# Altium PCB dc_dc_ver01.PcbDoc
Units mil, origin at the board's own origin, x right, y up, seen from the top; angles counter-clockwise.
Board outline 6299.21 x 3937.01 mil, 2 copper layers (Power layer 1, Signal layer), stack 12.8 mil thick; 59 components, 34 nets, 188 pads, 895 vias.
Unrouted connection lines stored in the file: 19.
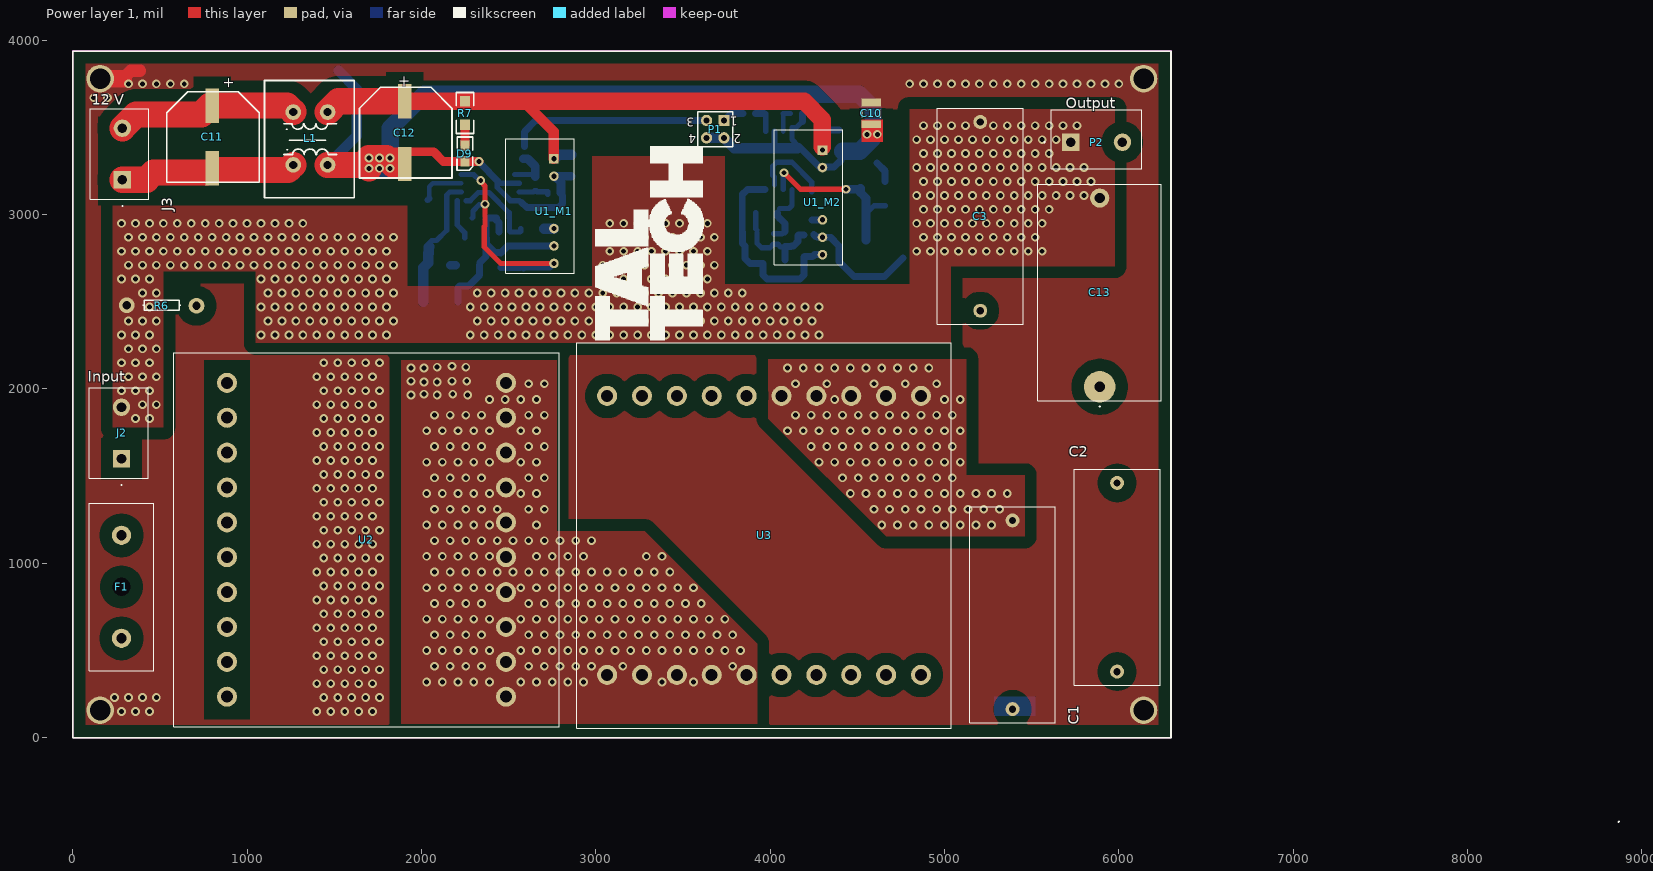
[diagram p0: Power layer 1 view]
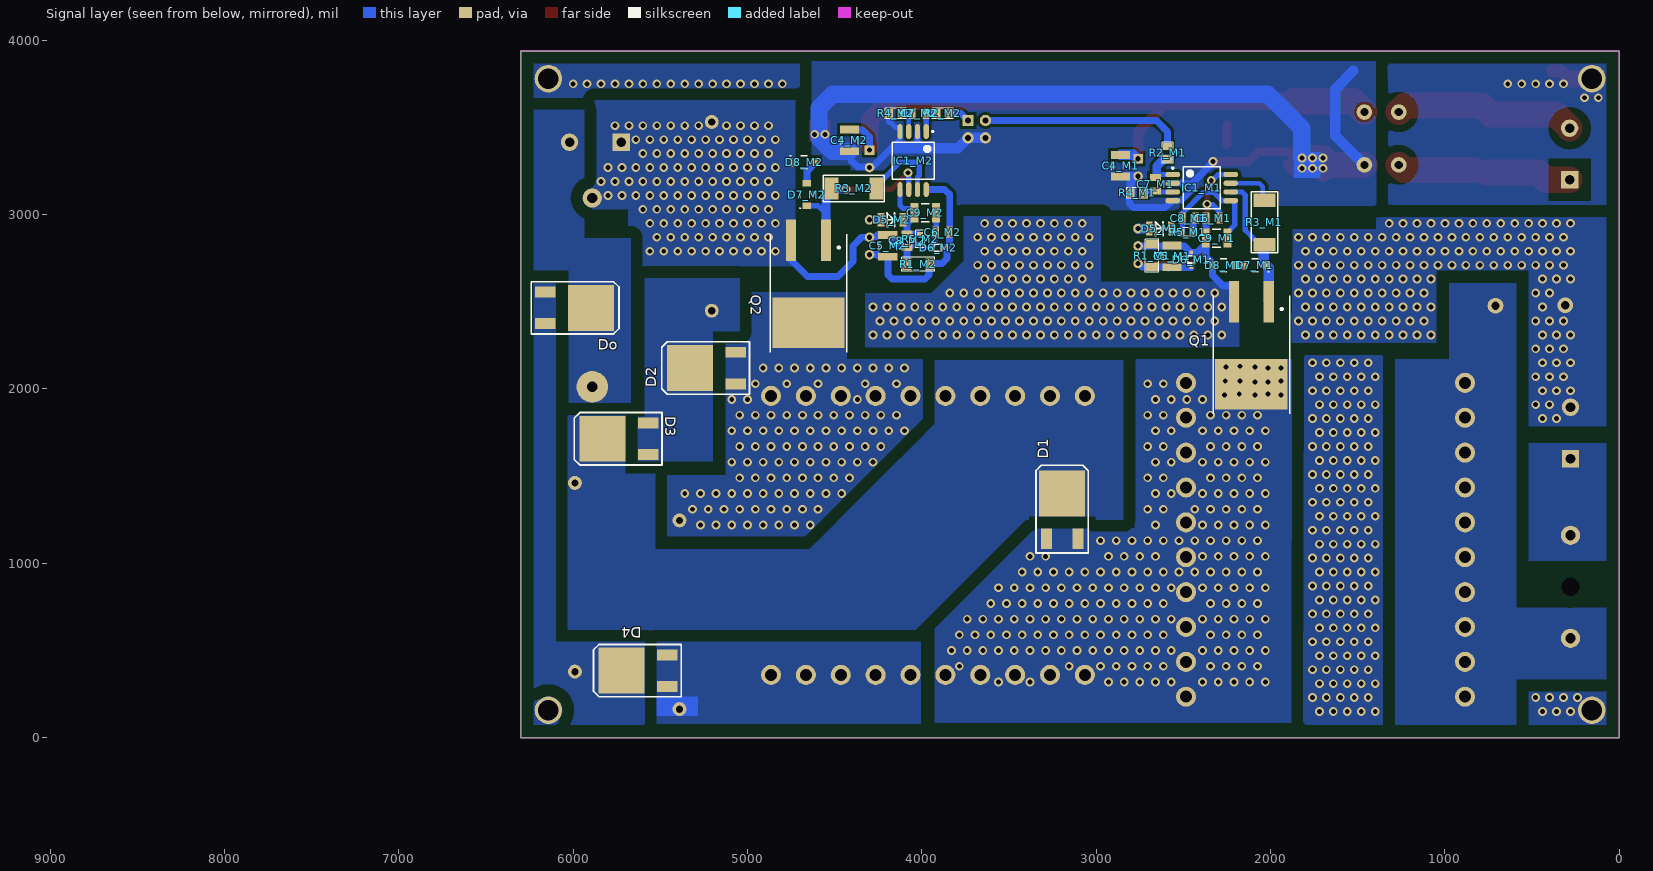
[diagram p1: Signal layer view, seen from below]
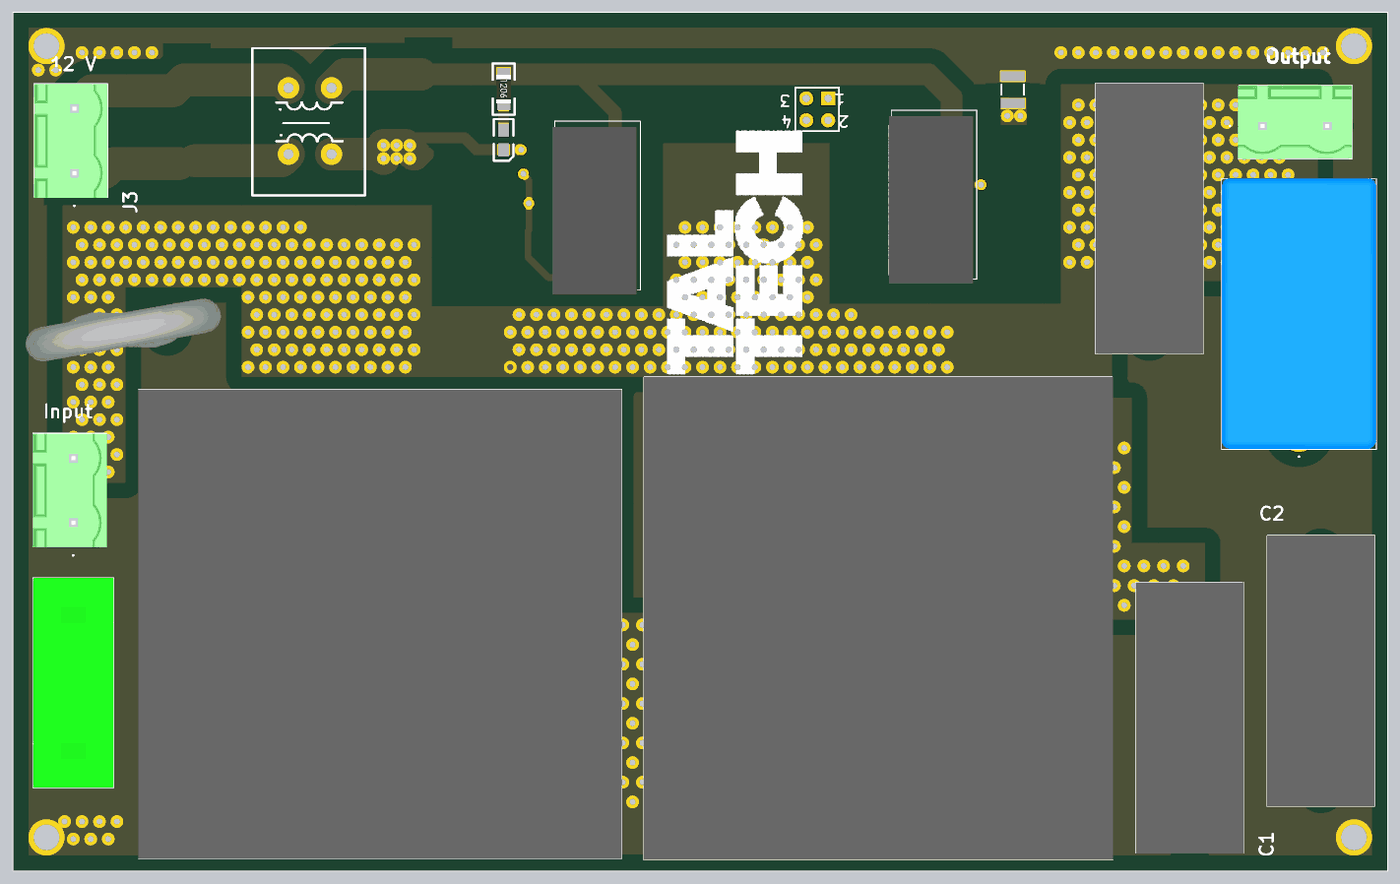
[diagram p2: 3D render of the assembled board from above, using the file's embedded part models]

## Layer stack, top to bottom
Top Solder: solder mask 0.4, Solder Resist, Dk 3.5
Power layer 1: signal copper 1.4
Dielectric 2: dielectric 10, FR-4, Dk 4.2
Signal layer: signal copper 1.4
Bottom Solder: solder mask 0.4, Solder Resist, Dk 3.5

## Board outline
0,0 0,3937.01 6299.21,3937.01 6299.21,0

## Design rules (kind name [scope] priority, off if disabled: settings)
Clearance [OnLayer('Bottom Overlay')] p1: gap=5 ignorepadtopadclearanceinfootprint=FALSE
Clearance Clearance_18 [InNet('G1') vs InNetClass('Driver')] p2: gap=20 ignorepadtopadclearanceinfootprint=FALSE
Clearance Clearance_17 [InNet('MS2') vs InNetClass('Driver')] p3: gap=20 ignorepadtopadclearanceinfootprint=FALSE
Clearance Clearance_16 [InNet('MS2') vs InNet('NetC5_M1_2')] p4: gap=20 ignorepadtopadclearanceinfootprint=FALSE
Clearance Clearance_15 [InNet('G2') vs InNet('NetC8_M2_1')] p5: gap=20 ignorepadtopadclearanceinfootprint=FALSE
Clearance Clearance_14 [InNet('NetIC1_M2_7') vs InNet('G2')] p6: gap=20 ignorepadtopadclearanceinfootprint=FALSE
Clearance Clearance_13 [InNet('MS2') vs InNet('NetC5_M2_2', 'NetD5_M2_1', 'NetC8_M2_1');] p7: gap=20 ignorepadtopadclearanceinfootprint=TRUE
Clearance Clearance_1 [InNet('G1') vs InNet('MS2')] p8: gap=15 ignorepadtopadclearanceinfootprint=FALSE
Clearance Clearance_8 [InNetClass('Power')] p9: gap=70 ignorepadtopadclearanceinfootprint=FALSE
Clearance Clearance_5 [InNetClass('Power') vs InNetClass('Power')] p10: gap=70 ignorepadtopadclearanceinfootprint=FALSE
Clearance Clearance_4 [InNetClass('Power') vs InNetClass('G[2..1]')] p11: gap=70 ignorepadtopadclearanceinfootprint=FALSE
Clearance Clearance_3 [InNetClass('Power') vs InNetClass('+12')] p12: gap=70 ignorepadtopadclearanceinfootprint=FALSE
Clearance Clearance_2 [InNetClass('Power') vs InNetClass('Signal')] p13: gap=70 ignorepadtopadclearanceinfootprint=FALSE
Clearance Clearance_12 [InNet('MS2') vs InNet('NetF1_1')] p14: gap=70 ignorepadtopadclearanceinfootprint=FALSE
Clearance Clearance_11 [InNet('Vin1')] p15: gap=70 ignorepadtopadclearanceinfootprint=FALSE
Clearance Clearance_7 [InNet('PE')] p16: gap=70 ignorepadtopadclearanceinfootprint=FALSE
Clearance Clearance_6 [InNetClass('Signal') vs InNetClass('Signal')] p17: gap=15 ignorepadtopadclearanceinfootprint=FALSE
Clearance Clearance_10 [InNetClass('All Nets')] p18: gap=20 ignorepadtopadclearanceinfootprint=FALSE
Clearance Clearance_19 [All] p19: gap=20 ignorepadtopadclearanceinfootprint=FALSE
ComponentClearance [InComponent('No Component') vs InComponent('No Component')] p1: gap=39.37 collisioncheckmode=3 verticalgap=0 showdistances=FALSE
Height [All] p1: minheight=0 maxheight=10000 prefheight=500
PolygonConnect [All] p1: connectstyle=Direct reliefconductorwidth=10 reliefentries=4 polygonreliefangle="90 Angle" airgapwidth=10
RoutingVias [All] p1: holewidth=28 width=50 viastyle="Through Hole" minholewidth=28 minwidth=50 maxholewidth=28 maxwidth=50
SolderMaskExpansion [All] p1: expansion=4 istentingtop=FALSE
Width [All] p1: maxlimit=200 minlimit=15 preferedwidth=30
28 further rules are at their usual default settings.

## Classes and differential pairs
channel class Driver: M1 M2
net class Signal: +12V GND NetC7_M1_1 NetC7_M1_2 NetC7_M2_1 NetC7_M2_2 Sig1 Sig2
net class Sig[2..1]: Sig1 Sig2
net class Power: G1 G2 MS2 NetC1_1 NetC1_2 NetC2_1 NetC2_2 NetC3_1 NetC13_1 NetD1_1 NetF1_1 Vin1
net class MS[2..1]: MS2
net class G[2..1]: G1 G2
net class Driver: G1 G2 MS2 NetC5_M1_2 NetC5_M2_2 NetC8_M1_1 NetC8_M2_1 NetD5_M1_1 NetD5_M2_1 NetD7_M1_2 NetD7_M2_2 NetIC1_M1_7 NetIC1_M2_7
net class +12: +12V GND NetC11_1 NetC11_2 NetD9_1
component class "Power Board": C1 C2 C3 D1 D2 D3 D4 Do Q1 Q2 U2 U3
component class Main_Clean: C10 C11 C12 C13 D9 F1 J2 J3 L1 P1 P2 R6 R7
component class M2: C4_M2 C5_M2 C6_M2 C7_M2 C8_M2 C9_M2 D5_M2 D6_M2 D7_M2 D8_M2 IC1_M2 R1_M2 R2_M2 R3_M2 R4_M2 R5_M2 U1_M2
component class M1: C4_M1 C5_M1 C6_M1 C7_M1 C8_M1 C9_M1 D5_M1 D6_M1 D7_M1 D8_M1 IC1_M1 R1_M1 R2_M1 R3_M1 R4_M1 R5_M1 U1_M1

## Components (designator, comment, footprint, x,y, rotation, side; value= is the part's Value field where it differs from the comment)
C1 "B32524R3106K" B32524R3106K 5390,705 r270 top
C2 "B32524R3106K" B32524R3106K 5990,920 r270 top
C3 "B32524R3106K" B32524R3106K 5205,2990 r90 top
C4_M1 "Cer_large" CAPC3227X25N 2860,3280 r270 bottom value=22mkF (schematic designator C4)
C4_M2 "Cer_large" CAPC3227X25N 4415,3425 r270 bottom value=22mkF (schematic designator C4)
C5_M1 "Cer_large" CAPC3227X25N 2565,2760 r270 bottom value=22mkF (schematic designator C5)
C5_M2 "Cer_large" CAPC3227X25N 4195,2820 r270 bottom value=22mkF (schematic designator C5)
C6_M1 "C0805C104K5RAC" C_0805 2370,2980 r180 bottom value=0.1uF (schematic designator C6)
C6_M2 "C0805C104K5RAC" C_0805 3920,2900 r180 bottom value=0.1uF (schematic designator C6)
C7_M1 "C0805C100J1GAC" C_0805 2660,3213.74 r270 bottom value=10pF (schematic designator C7)
C7_M2 "C0805C100J1GAC" C_0805 3976.26,3580 r0 bottom value=10pF (schematic designator C7)
C8_M1 "C0805C104K5RAC" C_0805 2508.74,2980 r180 bottom value=0.1uF (schematic designator C8)
C8_M2 "C0805C104K5RAC" C_0805 4085,2890 r270 bottom value=0.1uF (schematic designator C8)
C9_M1 "Cer_large" CAPC3227X25N 2310,2865 r0 bottom value=22mkF (schematic designator C9)
C9_M2 "Cer_large" CAPC3227X25N 3980,3010 r180 bottom value=22mkF (schematic designator C9)
C10 "Cer_large" CAPC3227X25N 4580,3580 r90 top value=22mkF
C11 "NACEW102M25V12.5X14" Cap_pol 1940,4835 r270 top value="1 mF"
C12 "NACEW102M25V12.5X14" Cap_pol 3045,4860 r270 top value="1 mF"
C13 "B32924P3335M000" B32924P_(31.5_x_18) 5890,2012.32 r90 top
D1 "Diode" Dpak 3345.55,1059.81 r180 bottom
D2 "Diode" Dpak 4988,1970 r90 bottom
D3 "Diode" Dpak 5489.81,1564.45 r90 bottom
D4 "Diode" Dpak 5379.81,234.45 r90 bottom
D5_M1 "Zener_1.8V" SOD123 2581.81,3038.11 r180 bottom value=1.8V (schematic designator D5)
D5_M2 "Zener_1.8V" SOD123 4120.83,3088.11 r180 bottom value=1.8V (schematic designator D5)
D6_M1 "DZ2J220M0L" SOD323F 2455,2740 r90 bottom value="22V, 200mW" (schematic designator D6)
D6_M2 "DZ2J220M0L" SOD323F 3906.69,2810 r0 bottom value="22V, 200mW" (schematic designator D6)
D7_M1 "MMSZ4678T1G" CAPM3216X18N 2090,2710 r0 bottom value="6V, 500mW" (schematic designator D7)
D7_M2 "MMSZ4678T1G" CAPM3216X18N 4660,3115 r90 bottom value="6V, 500mW" (schematic designator D7)
D8_M1 "MMSZ4678T1G" CAPM3216X18N 2270,2710 r180 bottom value="6V, 500mW" (schematic designator D8)
D8_M2 "MMSZ4678T1G" CAPM3216X18N 4675,3300 r180 bottom value="6V, 500mW" (schematic designator D8)
D9 "LED1" 0805_LED 2250,3350 r180 top
Do "Diode" Dpak 6240.19,2615.55 r270 bottom
F1 "0PTF0075P" 0PTF0075P 280,1160.55 r270 top
IC1_M1 "ACPL-H342" SOIC127P970X330-8N 2395,3155 r180 bottom value="2,5 A, 12-30V" (schematic designator IC1)
IC1_M2 "ACPL-H342" SOIC127P970X330-8N 4050,3310 r270 bottom value="2,5 A, 12-30V" (schematic designator IC1)
J2 "1766453" 1766453 280,1600 r90 top
J3 "1766453" 1766453 285,3200 r90 top
L1 "Commom_mode_choke" Common_mode 1339.8,3391.3 r0 top value="20 mH 0.5 A"
P1 "Header 2X2" HDR2X2 3735,3540 r180 top
P2 "1766453" 1766453 5725,3415 r0 top
Q1 "IPB048N15N5LFATMA1" D2PAK 2010,2500 r0 bottom
Q2 "IPB048N15N5LFATMA1" D2PAK 4550,2852.44 r0 bottom
R1_M1 "RK73H2BTTD1002F" SMD_1206 2680,2740 r90 bottom value="10k, 0.25 W" (schematic designator R1)
R1_M2 "RK73H2BTTD1002F" SMD_1206 3995,2715 r0 bottom value="10k, 0.25 W" (schematic designator R1)
R2_M1 "RK73H2ATTD1600F" SMD_0805 2590,3355 r270 bottom value="160R, 0.125W" (schematic designator R2)
R2_M2 "RK73H2ATTD1600F" SMD_0805 3880,3580 r0 bottom value="160R, 0.125W" (schematic designator R2)
R3_M1 "RK73B3ATTE120J" SMD_2512 2035,2955 r270 bottom value="12, 1W" (schematic designator R3)
R3_M2 "RK73B3ATTE120J" SMD_2512 4390,3150 r0 bottom value="12, 1W" (schematic designator R3)
R4_M1 "RK73H2ATTD1600F" SMD_0805 2765,3125 r180 bottom value="160R, 0.125W" (schematic designator R4)
R4_M2 "RK73H2ATTD1600F" SMD_0805 4150,3580 r180 bottom value="160R, 0.125W" (schematic designator R4)
R5_M1 "R4K7" smd_0603 2475,2900 r0 bottom value="4.7K, 0.125W" (schematic designator R5)
R5_M2 "R4K7" smd_0603 4010,2860 r90 bottom value="4.7K, 0.125W" (schematic designator R5)
R6 "420 VAC , 560 VDC" AXIAL-0.3 510,2480 r0 top
R7 "R300" "1206_SMD 2" 2200,3700.98 r270 top value="300, 0.125W"
U1_M1 "MGJ2D242005SC" MURATA-MGJ2 2760,3320 r270 top (schematic designator U1)
U1_M2 "MGJ2D242005SC" MURATA-MGJ2 4300,3370 r270 top (schematic designator U1)
U2 "B66368B1020T1" B66368B1020T1 885,2035 r270 top
U3 "B66368B1020T1" B66368B1020T1 3065,360 r0 top

## Footprints (in the part's own frame and the unit in brackets; to place one, negate y for a bottom-side part, rotate by r counter-clockwise, add the part's x,y. Pads: shape width x height; smd on the part's side, far side on the other; paste and mask are expansions set on the pad)
0PTF0075P [mm]
  round 2.794 hole 1.5: 1(0,0) 2(15,0)
  round 1.325 hole 2.65 unplated: MH1(7.5,0)
  silkscreen extent -4.7,-4.7 19.7,4.7, body extent -4.7,-4.7 19.7,4.7, height 11.42
0805_LED [mil]
  rect 50x60 smd: A(0.2,-44.8) K(0.2,45.2)
  silkscreen extent -45,-95 45,95
"1206_SMD 2" [mil]
  rect 60x60 smd: 1(50.98,50) 2(185.98,50)
  silkscreen extent 1,0 236,100, body extent 53,16 184,84, height 33
1766453 [mm]
  rect 2.54x2.54 hole 1.4: 1(0,0)
  round 2.54 hole 1.4: 2(7.5,0)
  silkscreen extent -3.9,-3.87 10.35,4.7, body extent -2.9,-3.89 10.3,4.71, height 12.6
AXIAL-0.3 [mil]
  round 90 hole 47.24: 1(-200,0) 2(200,-2.95)
  silkscreen extent -109,-30 109,30, body extent -465,-181 463,181, height 1634
B32524R3106K [mil]
  round 80 hole 41.34: 1(-541.34,0) 2(541.34,0)
  silkscreen extent -620,-246 620,246, body extent -620,-246 620,246, height 850
B32924P_(31.5_x_18) [mil]
  round 180 hole 59.06: 1(0,0)
  round 110 hole 59.06: 2(1082.68,0)
  silkscreen extent -114,-354 1161,354, body extent -76,-354 1164,354, height 1293
B66368B1020T1 [mil]
  round 115 hole 68.9: 1(0,0) 2(200,0) 3(400,0) 4(600,0) 5(800,0) 6(1000,0) 7(1200,0) 8(1400,0) 9(1600,0) 10(1800,0) 11(1800,1600) 12(1600,1600) 13(1400,1600) 14(1200,1600) 15(1000,1600) 16(800,1600) 17(600,1600) 18(400,1600) 19(200,1600) 20(0,1600)
  silkscreen extent -173,-306 1973,1906, body extent -173,-306 1973,1906, height 1614
C_0805 [mm]
  rect 1x1.6 smd: 1(0,0) 2(2,0)
  body extent 0.02,-0.62 2.02,0.63, height 0.78
Cap_pol [mil]
  rect 196.85x78.74 smd mask+4: 1(1210,-1140)
  rect 196.85x78.74 smd: 2(1570,-1140)
  silkscreen extent 1130,-1400 1650,-870
CAPC3227X25N [mm] "Chip Capacitor, 2-Leads, Body 3.2x2.7mm, IPC Medium Density"
  rect 1.15x2.8 smd: 1(-1.575,0) 2(1.575,0)
  silkscreen extent -0.6,-1.3 0.6,1.3, body extent -1.75,-1.35 1.75,1.35, height 2.5
CAPM3216X18N [mm]
  rect 0.91x1.22 smd: 1(-1.635,0) 2(1.635,0)
  silkscreen extent -2.04,-0.95 0.48,1, body extent -1.42,-0.9 1.42,0.9, height 1.35
Common_mode [mm]
  round 2.286 hole 1.2: 1(-1.9,5) 2(-1.9,-2.7) 3(3.1,-2.7) 4(3.1,5)
  silkscreen extent -6.1,-7.5 7,9.6
D2PAK [mm]
  rect 1.5x6 smd: 1(0,0) 3(5.08,0)
  rect 10.55x7.4 smd: 2(2.54,12)
  silkscreen extent -3.04,-0.9 8.12,16.3, body extent -2.54,-0.84 7.62,14.42, height 4.88
Dpak [mm]
  rect 1.6x3 smd: 1(1.51,2.037) 3(6.11,2.037)
  rect 6.7x6.7 smd: 2(3.81,8.687)
  silkscreen extent 0,0 7.62,12.78, body extent 0.49,1.71 7.03,11.65, height 2.41
HDR2X2 [mil] "Connector; Header; 2x2 Position"
  rect 65x65 hole 35.43: 1(0,0)
  round 65 hole 35.43: 2(0,100) 3(100,0) 4(100,100)
  silkscreen extent -50,-50 150,150
MURATA-MGJ2 [mil]
  rect 55x55 hole 29.53: 1(0,0)
  round 55 hole 29.53: 2(100,0) 5(400,0) 6(500,0) 7(600,0)
  silkscreen extent -116,-276 657,115, body extent -90,-288 678,98, height 506
smd_0603 [mm]
  rect 0.6x0.9 smd: 1(-0.75,0) 2(0.75,0)
  silkscreen extent -1.27,-0.64 1.27,0.64
SMD_0805 [mm]
  rect 1.05x1.3 smd: 1(-0.889,0) 2(0.889,0)
  silkscreen extent -1.52,-0.76 1.52,0.76
SMD_1206 [mm]
  rect 1.25x1.7 smd: 1(-1.016,0) 2(2.286,0)
  silkscreen extent -1.78,-1.02 3.05,1.02
SMD_2512 [mm]
  rect 2x3.2 smd: 1(-3.25,0) 2(3.25,0)
  silkscreen extent -4.44,-1.91 4.44,1.91
SOD123 [mm]
  rect 1x2 smd: 1(-2.9,-3) 2(0.3,-3)
  silkscreen extent -2.3,-4 -0.3,-2
SOD323F [mm]
  rect 0.5x0.5 smd: 1(1.1,0) 2(-1.1,0)
  silkscreen extent -0.5,-0.5 0.6,0.5, body extent -0.9,-0.67 0.9,0.67, height 0.8
SOIC127P970X330-8N [mm] "SOIC, 8-Leads, Body 6.1x6.8mm (max), Pitch 1.27mm, IPC Medium Density"
  oval 2.16x0.76 smd: 1(-4.225,1.905) 2(-4.225,0.635) 3(-4.225,-0.635) 4(-4.225,-1.905) 5(4.225,-1.905) 6(4.225,-0.635) 7(4.225,0.635) 8(4.225,1.905)
  silkscreen extent -4.35,-3.05 2.7,3.05, body extent -3.4,-3.05 3.4,3.05, height 3.3

## Part data
C1 C2 C3: "Capacitor", Manufacturer_Name=TDK, Mouser Part Number=871-B32524R3106K, Arrow Part Number=B32524R3106K, Arrow Price/Stock=https://www.arrow.com/en/products/b32524r3106k/epcos-tdk?region=nac, Datasheet Link=https://componentsearchengine.com/Datasheets/1/B32524R3106K.pdf, Height=21.5mm, Manufacturer_Part_Number=B32524R3106K, Mouser Price/Stock=https://www.mouser.co.uk/ProductDetail/EPCOS-TDK/B32524R3106K?qs=xEJ61ozf1a2Uwb6OZwaixw%3D%3D
C4_M1 C4_M2 C5_M1 C5_M2 C9_M1 C9_M2 C10: Package=1210, Order code=1759466, Price=0.407, Supplier=Farnel, Type=16V
C6_M1 C6_M2 C8_M1 C8_M2: "0.1u, 50V", Manufacturer=Kemet, Package="smd 0805", Order code=6576631, Price=0,06, Supplier=Elfa, Type=C0805C104K5RAC
C7_M1 C7_M2: "10p, 100V", Manufacturer=Kemet, Package="smd 0805", Order code=6576805, Price=0,266, Supplier=Elfa, Type=C0805C100J1GAC
C13: "Capacitor", Manufacturer_Name=TDK, Mouser Part Number=871-B32924P3335M000, Datasheet Link=https://product.tdk.com/system/files/dam/doc/product/capacitor/film/emi/data_sheet/x2_b32922_924_p_q.pdf, Height=33mm, Manufacturer_Part_Number=B32924P3335M000, Mouser Price/Stock=https://www.mouser.co.uk/ProductDetail/EPCOS-TDK/B32924P3335M000?qs=KUoIvG%2F9IlY7%252B78GbxRzbA%3D%3D
D1 D2 D3 D4 Do: "Default Diode", Code_JEDEC=DO-214-AB, LatestRevisionDate=17-Jul-2002, LatestRevisionNote="Re-released for DXP Platform.", PackageDescription="DO-214-AB/SMC; 2 C-Bend Leads; Body 7.9 x 5.9 mm, inc. leads (LxW)", PackageReference=SMC, PackageVersion=Sep-1996, Published=8-Jun-2000, Publisher="Altium Limited"
D5_M1 D5_M2: "Zener diode", Package=SOD-123, Order code=1459115, Price=0.172, Supplier=Farnell, Type=0.5W
D6_M1 D6_M2: Package=SOD323F, Order code=2285315, Price=0.041, Supplier=Farnel, Type="Zener diode"
D7_M1 D7_M2 D8_M1 D8_M2: library part Zener_MMSZ5233BT1G, "6V, 500mW, Zener Diodes", Manufacturer="ON Semiconductor", Package=SOD-123-2, PartNumber=MMSZ5233BT1G, Order code=863-MMSZ5233BT1G, Price=0,18, Supplier=Mouser, Type="Zener Diodes"
D9: "Typical RED GaAs LED", LatestRevisionDate=08-Jul-2005, LatestRevisionNote="Mech Layer 1 removed.", PackageDescription="LED; 2 Leads", PackageReference=LED-1, Published=8-Jun-2000, Publisher="Altium Limited"
F1: "Fuse", Manufacturer_Name=LITTELFUSE, Mouser Part Number=576-0PTF0075P, Arrow Part Number=0PTF0075P, Arrow Price/Stock=https://www.arrow.com/en/products/0ptf0075p/littelfuse?region=europe, Datasheet Link=https://media.digikey.com/pdf/Data%20Sheets/Littelfuse%20PDFs/0PTF0075P_Dwg.pdf, Height=11.5mm, Manufacturer_Part_Number=0PTF0075P, Mouser Price/Stock=https://www.mouser.co.uk/ProductDetail/Littelfuse/0PTF0075P?qs=gu7KAQ731UQYbEqVl9aylw%3D%3D
IC1_M1 IC1_M2: Manufacturer=Avago, Package=SSO-8, Order code=1833408, Price=2, Supplier=Farnell, Type=ACPL-H342
J2 J3 P2: "Connector", Manufacturer_Name="Phoenix Contact", Mouser Part Number=651-1766453, Datasheet Link=http://www.phoenixcontact.com/de/produkte/1766453/pdf, Height=12mm, Manufacturer_Part_Number=1766453, Mouser Price/Stock=https://www.mouser.co.uk/ProductDetail/Phoenix-Contact/1766453?qs=s6DiDDoRpTbteEwY3ZEIDg%3D%3D
L1: Manufacturer="Wьrth Elektronik", Package=Trough_hole, Order code=15857854, Price=4,54, Supplier=Elfa, Type="Common mode choke"
P1: "Header, 2-Pin, Dual row", LatestRevisionDate=17-Jul-2002, LatestRevisionNote="Re-released for DXP Platform.", Publisher="Altium Limited"
Q1 Q2: "Trans MOSFET N-CH 150V 120A 3-Pin(2+Tab) D2PAK T/R", Manufacturer_Name=Infineon, Mouser Part Number=726-IPB048N15N5LF, Datasheet Link=https://componentsearchengine.com/Datasheets/1/IPB048N15N5LFATMA1.pdf, Geometry.Height=4.82mm, Manufacturer_Part_Number=IPB048N15N5LFATMA1, Mouser Price/Stock=https://www.mouser.co.uk/ProductDetail/Infineon-Technologies/IPB048N15N5LFATMA1?qs=HXFqYaX1Q2ypITzfwKA8Fg%3D%3D
R1_M1 R1_M2: "10k, 0.25 W", Manufacturer=KOA, Package="smd 1206", datasheet=https://www1.elfa.se/data1/wwwroot/assets/datasheets/06016752.pdf, Order code=6019731, Price=0,111, Supplier=Elfa, Type=RK73H2BTTD1002F
R2_M1 R2_M2 R4_M1 R4_M2: "160R, 0.125W", Manufacturer=KOA, Package="smd 0805", Order code=60-173-05, Price=0.097, Supplier=Elfa, Type="1%, 150V"
R3_M1 R3_M2: Manufacturer=KOA, Package="smd 2512", Order code=60-205-98, Price=0,144, Supplier=Elfa, Type="200V, 5%"
R5_M1 R5_M2: Package="smd 0603", Order code=9332154, Price=0.01, Supplier=Farnel, Type="16V, 1%"
R6: library part Var_V420LA10P, "420 VAC , 560 VDC, Varistor", Manufacturer=EPCOS, Package="48X8X6 mm", PartNumber=B72207S0461K101, Supplier Part Number 1=871-B72207S461K101, Order code=871-B72207S461K101, Price=0,432, Supplier=Mouser, Supplier 1=Mouser, Type=Varistors
R7: Package="smd 2010", Type="16V, 1%"
U1_M1 U1_M2: "Undefined or Miscellaneous", Manufacturer_Name="Murata Electronics", Mouser Part Number=580-MGJ2D242005SC, Arrow Part Number=MGJ2D242005SC, Arrow Price/Stock=https://www.arrow.com/en/products/mgj2d242005sc/murata-power-solutions?region=nac, Datasheet Link=http://power.murata.com/data/power/ncl/kdc_mgj2.pdf, Manufacturer_Part_Number=MGJ2D242005SC, Mouser Price/Stock=https://www.mouser.co.uk/ProductDetail/Murata-Power-Solutions/MGJ2D242005SC?qs=xLDY6iXSiQZFsrjCzeaXXw%3D%3D
U2 U3: "Undefined or Miscellaneous", Manufacturer_Name=TDK, Mouser Part Number=871-B66368B1020T1, Arrow Part Number=B66368B1020T1, Arrow Price/Stock=https://www.arrow.com/en/products/b66368b1020t1/epcos-tdk?region=nac, Datasheet Link=https://www.mouser.com/datasheet/2/400/etd_49_25_16-1220447.pdf, Height=40.9mm, Manufacturer_Part_Number=B66368B1020T1, Mouser Price/Stock=https://www.mouser.co.uk/ProductDetail/EPCOS-TDK/B66368B1020T1?qs=fWY6Jreybtns4G%252BQgkB59A%3D%3D
C11 C12: Order code=16731346, Price=3,28, Supplier=Elfa, Type=25V

## Free pads (board coordinates)
  round 157.48 hole 118.11: 0(157.48,157.48) 0(157.48,3779.53) 0(6141.73,157.48) q(6141.73,3779.53)

## Via types
v1: diameter 50, hole 28, Power layer 1 to Signal layer, 895 vias

## Nets (pads, with @x,y where several pads share a name; then routed paths per layer and width w, separated by ;. In a path a pad name is that pad's centre, name@x,y a point inside that pad or via, vN(x,y) a via of type N, cw(c..) or ccw(c..) an arc to the next point about the centre after c; other vN are vias at no path point)
+12V: C4_M1.1 C4_M2.1 C12.1 L1.4 R7.1 U1_M1.1 U1_M2.1 | length 3719.8
  Power layer 1 w60: 2585,3650 2760,3475 U1_M1.1
  Power layer 1 w100: C12.1 R7.1 2585,3650 4195,3650 4300,3545 U1_M2.1@4300,3390
  Power layer 1 w150: L1.4 1523.7,3650 C12.1@1869.37,3650
  Signal layer w40: U1_M2.1 4300,3445 4339.37,3484.37 4394.37,3484.37 C4_M2.1@4395,3485
  Signal layer w60: U1_M1.1@2765,3320 2787.01,3342.01 C4_M1.1
G1: D7_M1.1 IC1_M1.6 Q1.1 R3_M1.2 | length 767.4
  Signal layer w30: R3_M1.2 2059.37,2851.42 2086.42,2851.42 2145,2910 2145,3112.39 2162.57,3129.96 2228.62,3129.96 IC1_M1.6
  Signal layer w60: Q1.1 2010,2694.37 D7_M1.1 2040,2724.37 2040,2777.53 2042.01,2779.54 2042.01,2812.68 R3_M1.2@2044.67,2815.33
G2: D7_M2.1 IC1_M2.6 Q2.1 R3_M2.2 | length 1083.5
  Power layer 1 w30: v1(4080,3240) 4175,3145 v1(4435,3145)
  Signal layer w30: IC1_M2.6 4075,3171.14 4075.04,3171.18 4075.04,3229.63 4080,3234.59 v1(4080,3240) ; Q2.1@4550,2950 4550,3005 4595.63,3050.63 D7_M2.1
  Signal layer w50: v1(4435,3145) 4503.58,3145 R3_M2.2@4522.95,3125.63 ; R3_M2.2 4517.95,3126.38 4550,3094.33 4550,3005 4550,2950 Q2.1
GND: C4_M1.2 C4_M2.2 C10.1 C12.2 D9.K IC1_M1.2 IC1_M1.4 IC1_M2.2 IC1_M2.4 L1.3 P1.2 P1.4 R4_M1.1 R4_M2.1 U1_M1.2 U1_M2.2 | length 7458.1
  Power layer 1 w50: v1(1700,3265) v1(1760,3265) ; 1795,3360 2070,3360 2125,3305 D9.K@2240,3305 ; v1(1820,3265) 1890.63,3265 1905,3279.37 C12.2 ; D9.K@2255,3310 2260,3305 v1(2330,3305)
  Power layer 1 w150: L1.3 1680,3285 v1(1700,3265) v1(1700,3325) 1800,3325 1840,3285
  Signal layer w30: 2440,3195 2437.5,3192.5 2435,3190 2435,3180 2435,3155 2509.96,3080.04 IC1_M1.4 IC1_M1.4 ; 2450,3180 IC1_M1.2 ; 4161.34,3393.66 4125,3430 IC1_M2.4 4125,3499.96 4125.04,3500 4150,3500 4184.33,3534.33
  Signal layer w35: 4025,3380 IC1_M2.2
  Signal layer w40: v1(2330,3305) 2330,3302.29 2388.48,3243.81 2388.48,3241.52 2437.5,3192.5 ; IC1_M1.4@2574.96,3070.04 2605,3040 2787.02,3040 2810.46,3063.43 2810.46,3109.62 2800.67,3119.41 2800.67,3124.33 R4_M1.1 ; 4165,3390 4283.24,3271.76 4298.24,3271.76 U1_M2.2 ; 4184.33,3534.33 4184.33,3579.33 R4_M2.1 ; U1_M2.2@4301.76,3271.76 4366.76,3271.76 4405,3310
  Signal layer w50: U1_M1.2 U1_M1.2@2765,3220 ; R4_M1.1 2800,3185 U1_M1.2@2765,3220 ; C4_M1.2@2857.99,3220 U1_M1.2@2765,3220
  Signal layer w60: L1.3 1630,3453.15 1630,3720 1525,3825 ; P1.4 P1.2 3795,3380 4025,3380 4155,3380
  Signal layer w100: 1790,3305 v1@1810,3305 ; v1(1820,3325) 1820,3495 2015,3690 4510,3690 4590,3610 4590,3440 4512.99,3362.99 C4_M2.2
  other v1: 1760,3325 4555,3460 4615,3460
MS2: C3.2 C5_M1.1 C5_M2.1 C6_M1.1 C6_M2.1 C8_M1.2 C8_M2.2 C9_M1.2 C9_M2.2 C13.2 D6_M1.1 D6_M2.1 D8_M1.1 D8_M2.1 J2.2 P2.1 Q1.3 Q2.3 R1_M1.2 R1_M2.2 R5_M1.1 R5_M2.1 R6.1 U1_M1.6 U1_M2.6 | length 2387.6
  Signal layer w30: C9_M2.2 3917.99,2917.01 C6_M2.1@3925,2910 ; C6_M2.1@3924.69,2895 3924.69,2835.31 D6_M2.1 3999.53,2810 4020,2830.47 4044.53,2830.47 C8_M2.2@4060,2815
  Signal layer w40: Q1.3 2210,2581.72 2219.53,2591.25 2271.25,2591.25 2334.37,2654.37 D8_M1.1 ; D8_M1.1@2335,2725 2369.37,2759.37 2369.37,2831.89 2372.01,2834.53 C9_M1.2 ; C9_M1.2@2370,2834.53 2421.22,2783.31 D6_M1.1 ; C9_M1.2@2370,2865 C6_M1.1@2370,2960 ; C6_M1.1 C8_M1.2@2425,2980 ; C8_M1.2@2426.26,2968.82 2426.26,2980 C8_M1.2@2426.57,2979.69 ; C8_M1.2 2430,2968.82 2430.31,2968.5 2431.11,2968.5 2445.47,2954.14 R5_M1.1 ; D6_M1.1@2455,2780 2495,2820 U1_M1.6 ; R1_M2.2@4085,2740 4085,2816.26 4118.94,2816.26 4123.31,2820.63 4133.62,2820.63 4159.88,2846.89 4159.88,2879.37 4162.52,2882.01 C5_M2.1 ; C5_M2.1@4250,2885 4260,2875 4265,2875 4268.24,2871.76 4298.24,2871.76 U1_M2.6 4345,2870 4395,2820 4395,2730 4480,2645 4655,2645 Q2.3@4761.93,2751.93
  other v1: 360,1830 440,1830 400,1910 480,1910 280,1990 360,1990 440,1990 320,2070 400,2070 480,2070 280,2150 360,2150 440,2150 320,2230 400,2230 480,2230 280,2310 360,2310 440,2310 1080,2310 1160,2310 1240,2310 1320,2310 1400,2310 1480,2310 1560,2310 1640,2310 1720,2310 1800,2310 2280,2310 2360,2310 2440,2310 2520,2310 2600,2310 2680,2310 2760,2310 2840,2310 2920,2310 3000,2310 3080,2310 3160,2310 3240,2310 3320,2310 3400,2310 3480,2310 3560,2310 3640,2310 3720,2310 3800,2310 3880,2310 3960,2310 4040,2310 4120,2310 4200,2310 4280,2310 320,2390 400,2390 480,2390 1120,2390 1200,2390 1280,2390 1360,2390 1440,2390 1520,2390 1600,2390 1680,2390 1760,2390 1840,2390 2320,2390 2400,2390 2480,2390 2560,2390 2640,2390 2720,2390 2800,2390 2880,2390 2960,2390 3040,2390 3120,2390 3200,2390 3280,2390 3360,2390 3440,2390 3520,2390 3600,2390 3680,2390 3760,2390 3840,2390 3920,2390 4000,2390 4080,2390 4160,2390 4240,2390 440,2470 1080,2470 1160,2470 1240,2470 1320,2470 1400,2470 1480,2470 1560,2470 1640,2470 1720,2470 1800,2470 2280,2470 2360,2470 2440,2470 2520,2470 2600,2470 2680,2470 2760,2470 2840,2470 2920,2470 3000,2470 3080,2470 3160,2470 3240,2470 3320,2470 3400,2470 3480,2470 3560,2470 3640,2470 3720,2470 3800,2470 3880,2470 3960,2470 4040,2470 4120,2470 4200,2470 4280,2470 400,2550 480,2550 1120,2550 1200,2550 1280,2550 1360,2550 1440,2550 1520,2550 1600,2550 1680,2550 1760,2550 1840,2550 2320,2550 2400,2550 2480,2550 2560,2550 2640,2550 2720,2550 2800,2550 2880,2550 2960,2550 3040,2550 3120,2550 3200,2550 3280,2550 3360,2550 3440,2550 3520,2550 3600,2550 3680,2550 3760,2550 3840,2550 280,2630 360,2630 440,2630 1080,2630 1160,2630 1240,2630 1320,2630 1400,2630 1480,2630 1560,2630 1640,2630 1720,2630 1800,2630 3080,2630 3160,2630 3240,2630 3320,2630 3400,2630 3480,2630 3560,2630 3640,2630 320,2710 400,2710 480,2710 560,2710 640,2710 720,2710 800,2710 880,2710 960,2710 1040,2710 1120,2710 1200,2710 1280,2710 1360,2710 1440,2710 1520,2710 1600,2710 1680,2710 1760,2710 1840,2710 3040,2710 3120,2710 3200,2710 3280,2710 3360,2710 3440,2710 3520,2710 3600,2710 3680,2710 280,2790 360,2790 440,2790 520,2790 600,2790 680,2790 760,2790 840,2790 920,2790 1000,2790 1080,2790 1160,2790 1240,2790 1320,2790 1400,2790 1480,2790 1560,2790 1640,2790 1720,2790 1800,2790 3080,2790 3160,2790 3240,2790 3320,2790 3400,2790 3480,2790 3560,2790 3640,2790 4840,2790 4920,2790 5000,2790 5080,2790 5160,2790 5240,2790 5320,2790 5400,2790 5480,2790 5560,2790 320,2870 400,2870 480,2870 560,2870 640,2870 720,2870 800,2870 880,2870 960,2870 1040,2870 1120,2870 1200,2870 1280,2870 1360,2870 1440,2870 1520,2870 1600,2870 1680,2870 1760,2870 1840,2870 3040,2870 3120,2870 3200,2870 3280,2870 3360,2870 3440,2870 3520,2870 3600,2870 3680,2870 4880,2870 4960,2870 5040,2870 5120,2870 5200,2870 5280,2870 5360,2870 5440,2870 5520,2870 280,2950 360,2950 440,2950 520,2950 600,2950 680,2950 760,2950 840,2950 920,2950 1000,2950 1080,2950 1160,2950 1240,2950 1320,2950 3080,2950 3160,2950 3240,2950 3320,2950 3400,2950 3480,2950 3560,2950 3640,2950 4840,2950 4920,2950 5000,2950 5080,2950 5160,2950 5240,2950 5320,2950 5400,2950 5480,2950 5560,2950 4880,3030 4960,3030 5040,3030 5120,3030 5200,3030 5280,3030 5360,3030 5440,3030 5520,3030 5600,3030 4840,3110 4920,3110 5000,3110 5080,3110 5160,3110 5240,3110 5320,3110 5400,3110 5480,3110 5560,3110 5640,3110 5720,3110 5800,3110 4880,3190 4960,3190 5040,3190 5120,3190 5200,3190 5280,3190 5360,3190 5440,3190 5520,3190 5600,3190 5680,3190 5760,3190 5840,3190 4840,3270 4920,3270 5000,3270 5080,3270 5160,3270 5240,3270 5320,3270 5400,3270 5480,3270 5560,3270 5640,3270 5720,3270 5800,3270 4880,3350 4960,3350 5040,3350 5120,3350 5200,3350 5280,3350 5360,3350 5440,3350 5520,3350 5600,3350 4840,3430 4920,3430 5000,3430 5080,3430 5160,3430 5240,3430 5320,3430 5400,3430 5480,3430 5560,3430 5640,3430 4880,3510 4960,3510 5040,3510 5120,3510 5280,3510 5360,3510 5440,3510 5520,3510 5600,3510 5680,3510 5760,3510
NetC1_1: C1.1 D2.1 D2.3 Q2.2 U3.11 U3.12 U3.13 U3.14 U3.15
  other v1: 4640,1220 4730,1220 4820,1220 4910,1220 5000,1220 5090,1220 5180,1220 5270,1220 4595,1310 4685,1310 4775,1310 4865,1310 4955,1310 5045,1310 5135,1310 5225,1310 5315,1310 4460,1400 4550,1400 4640,1400 4730,1400 4820,1400 4910,1400 5000,1400 5090,1400 5180,1400 5270,1400 5360,1400 4415,1490 4505,1490 4595,1490 4685,1490 4775,1490 4865,1490 4955,1490 5045,1490 4280,1580 4370,1580 4460,1580 4550,1580 4640,1580 4730,1580 4820,1580 4910,1580 5000,1580 5090,1580 4235,1670 4325,1670 4415,1670 4505,1670 4595,1670 4685,1670 4775,1670 4865,1670 4955,1670 5045,1670 4100,1760 4190,1760 4280,1760 4370,1760 4460,1760 4550,1760 4640,1760 4730,1760 4820,1760 4910,1760 5000,1760 5090,1760 4145,1850 4235,1850 4325,1850 4415,1850 4505,1850 4595,1850 4685,1850 4775,1850 4865,1850 4955,1850 5045,1850 4370,1940 5000,1940 5090,1940 4145,2030 4325,2030 4595,2030 4775,2030 4955,2030 4100,2120 4190,2120 4280,2120 4370,2120 4460,2120 4550,2120 4640,2120 4730,2120 4820,2120 4910,2120
NetC1_2: C1.2 D4.1 D4.3 U3.6 U3.7 U3.8 U3.9 U3.10
NetC2_1: C2.1 D1.2 D3.2 U3.16 U3.17 U3.18 U3.19 U3.20
NetC2_2: C2.2 D4.2 Do.1 Do.3
NetC3_1: C3.1 D2.2 D3.1 D3.3
NetC5_M1_2: C5_M1.2 C6_M1.2 D6_M1.2 IC1_M1.8 R1_M1.1 U1_M1.7 | length 1378.3
  Power layer 1 w30: v1(2340,3195) 2340,3189.59 2365,3164.59 2365,2936.54 2360.75,2932.29 2360.75,2814.25 2455,2720 U1_M1.7@2757.82,2720
  Signal layer w30: IC1_M1.8 IC1_M1.8 2299.63,3229.96 2334.59,3195 v1(2340,3195) ; C6_M1.2 2295.94,2984.69 2295.94,3020.94 2331.17,3056.17 2361.17,3056.17 v1(2365,3060)
  Signal layer w40: D6_M1.2 C5_M1.2@2565,2696.69 ; C5_M1.2@2585,2695 2590,2700 R1_M1.1 2737.51,2700 2757.51,2720 U1_M1.7
NetC5_M2_2: C5_M2.2 C6_M2.2 D6_M2.2 IC1_M2.8 R1_M2.1 U1_M2.7 | length 1167.1
  Signal layer w40: C6_M2.2@3840,2900 3840,3115 3870,3145 IC1_M2.8@3970,3145 ; C6_M2.2@3841.26,2888.82 C6_M2.2 3841.26,2833.74 3855,2820 3855,2748.62 3884.37,2719.25 3959.61,2719.25 3959.61,2653.43 3983.04,2630 4171.57,2630 4195,2653.43 C5_M2.2@4195,2750 ; C5_M2.2 4197.64,2760.63 4244.18,2760.63 4253.55,2770 U1_M2.7@4297.51,2770
NetC7_M1_1: C7_M1.1 IC1_M1.1 R2_M1.2 | length 258.1
  Signal layer w30: IC1_M1.1@2535,3230 IC1_M1.1 2635,3230 C7_M1.1@2645,3220
  Signal layer w50: R2_M1.2@2585,3320 R2_M1.2 2610,3320 2653.5,3276.5 C7_M1.1@2653.5,3219.06
NetC7_M1_2: C7_M1.2 IC1_M1.3 R4_M1.2 | length 184.4
  Signal layer w30: IC1_M1.3 2641.93,3130 2648.19,3136.26 2660,3136.26 2664.69,3131.57 2724.33,3131.57 2725,3130.91 R4_M1.2@2725,3115
NetC7_M2_1: C7_M2.1 IC1_M2.1 R2_M2.2 | length 153.6
  Signal layer w30: C7_M2.1@3965,3580 C7_M2.1@3975,3580 ; IC1_M2.1 3975.04,3476.38 C7_M2.1@3975.04,3569.96
  Signal layer w40: R2_M2.2 C7_M2.1@3965,3580
NetC7_M2_2: C7_M2.2 IC1_M2.3 R4_M2.2 | length 138.7
  Signal layer w28: IC1_M2.3 4075,3575
  Signal layer w30: 4075,3580 R4_M2.2
NetC8_M1_1: C8_M1.1 C9_M1.1 D5_M1.2 IC1_M1.5 R5_M1.2 | length 734.9
  Signal layer w30: IC1_M1.5@2205.47,3079.96 2205.47,2940 2247.99,2897.48 C9_M1.1 ; IC1_M1.5@2256.18,3080.04 2280.04,3080.04 2326.26,3126.26 2387.74,3126.26 2504.06,3009.95 2504.06,2980.94 2505,2980 R5_M1.2@2505,2902.72 ; R5_M1.2@2507.72,2900 2565.31,2900 2570,2904.69 D5_M1.2
NetC8_M2_1: C8_M2.1 C9_M2.1 D5_M2.2 IC1_M2.5 R5_M2.2 | length 361.8
  Signal layer w30: R5_M2.2@4020,2889.53 4067.72,2889.53 4073.19,2895 C8_M2.1@4085,2895 ; C9_M2.1@4055,3035 4107.43,3035 4125,3052.57 IC1_M2.5
  Signal layer w40: C9_M2.1 4042.01,2990.73 4057.86,2974.88 4060.12,2974.88 4085,2950 C8_M2.1@4085,2902.97
NetC11_1: C11.1 J3.2 L1.1 | length 1048.2
  Power layer 1 w150: J3.2 364.72,3575 737.8,3575 787.8,3625 1230,3625 L1.1@1265,3590
NetC11_2: C11.2 J3.1 L1.2 | length 938.4
  Power layer 1 w150: J3.1 422.8,3200 464.37,3241.57 C11.2@764.37,3241.57 ; C11.2@835.63,3255 1235,3255 L1.2
NetC13_1: C13.1 Do.2 P2.2
NetD1_1: D1.1 D1.3 Q1.2 U2.11 U2.12 U2.13 U2.14 U2.15 U2.16 U2.17 U2.18 U2.19 U2.20 U3.1 U3.2 U3.3 U3.4 U3.5
  other v1: 2030,320 2120,320 2210,320 2300,320 2390,320 2570,320 2660,320 2750,320 2840,320 2930,320 3380,320 3560,320 2075,410 2165,410 2255,410 2345,410 2615,410 2705,410 2795,410 2885,410 2975,410 3155,410 3785,410 2030,500 2120,500 2210,500 2300,500 2390,500 2570,500 2660,500 2750,500 2840,500 2930,500 3020,500 3110,500 3200,500 3290,500 3380,500 3470,500 3560,500 3650,500 3740,500 3830,500 2075,590 2165,590 2255,590 2345,590 2615,590 2705,590 2795,590 2885,590 2975,590 3065,590 3155,590 3245,590 3335,590 3425,590 3515,590 3605,590 3695,590 3785,590 2030,680 2120,680 2210,680 2300,680 2390,680 2570,680 2660,680 2750,680 2840,680 2930,680 3020,680 3110,680 3200,680 3290,680 3380,680 3470,680 3560,680 3650,680 3740,680 2075,770 2165,770 2255,770 2345,770 2615,770 2705,770 2795,770 2885,770 2975,770 3065,770 3155,770 3245,770 3335,770 3425,770 3515,770 3605,770 2030,860 2120,860 2210,860 2300,860 2390,860 2570,860 2660,860 2750,860 2840,860 2930,860 3020,860 3110,860 3200,860 3290,860 3380,860 3470,860 3560,860 2075,950 2165,950 2255,950 2345,950 2435,950 2525,950 2615,950 2705,950 2795,950 2885,950 2975,950 3065,950 3155,950 3245,950 3335,950 3425,950 2030,1040 2120,1040 2210,1040 2300,1040 2390,1040 2660,1040 2750,1040 2840,1040 2930,1040 3290,1040 3380,1040 2075,1130 2165,1130 2255,1130 2345,1130 2435,1130 2525,1130 2615,1130 2705,1130 2795,1130 2885,1130 2975,1130 2030,1220 2120,1220 2210,1220 2300,1220 2390,1220 2660,1220 2075,1310 2165,1310 2255,1310 2345,1310 2435,1310 2615,1310 2705,1310 2030,1400 2120,1400 2210,1400 2300,1400 2390,1400 2570,1400 2660,1400 2075,1490 2165,1490 2255,1490 2345,1490 2615,1490 2705,1490 2030,1580 2120,1580 2210,1580 2300,1580 2390,1580 2570,1580 2660,1580 2075,1670 2165,1670 2255,1670 2345,1670 2615,1670 2705,1670 2030,1760 2120,1760 2210,1760 2300,1760 2390,1760 2570,1760 2660,1760 2075,1850 2165,1850 2255,1850 2345,1850 2615,1850 2705,1850 2390,1940 2480,1940 2570,1940 2660,1940 1940,1965 2090,1965 2265,1965 2015,1970 2180,1970 2615,2030 2705,2030 2015,2040 2090,2040 1940,2045 2175,2045 2260,2045 1940,2120 2015,2120 2090,2125 2255,2125 2175,2130
NetD5_M1_1: D5_M1.1 U1_M1.5 | length 55
  Signal layer w60: D5_M1.1@2705,2920 U1_M1.5
NetD5_M2_1: D5_M2.1 U1_M2.5 | length 60
  Signal layer w40: D5_M2.1@4240,2970 U1_M2.5
NetD7_M1_2: D7_M1.2 D8_M1.2 | length 30
  Signal layer w50: D7_M1.2@2165,2710 D8_M1.2@2195,2710
NetD7_M2_2: D7_M2.2 D8_M2.2 | length 125.6
  Signal layer w40: D8_M2.2@4612.72,3295.98 4660,3248.7 D7_M2.2@4660,3190
NetD9_1: D9.A R7.2 | length 115
  Power layer 1 w50: D9.A@2250,3400 R7.2
NetF1_1: F1.1 J2.1
NetIC1_M1_7: IC1_M1.7 R3_M1.1 | length 273.1
  Signal layer w28: R3_M1.1@2045,3092.95 2045,3160 2065,3180 IC1_M1.7
  Signal layer w35: R3_M1.1 R3_M1.1@2045,3092.95
NetIC1_M2_7: IC1_M2.7 R3_M2.1 | length 447.5
  Signal layer w30: IC1_M2.7@4025,3171.18 4025,3215.15 4015,3225.15 4015,3277.43 4037.57,3300 4125,3300 4238.02,3186.98 R3_M2.1@4238.02,3129.02
PE: C10.2 pad.0 pad.q | length 246.9
  Power layer 1 w70: 289.53,3779.53 334.88,3824.88 385.63,3824.88
  Power layer 1 w100: pad.0@157.48,3779.53 289.53,3779.53
  other v1: 280,150 360,150 440,150 1400,150 1480,150 1560,150 1640,150 1720,150 240,230 320,230 400,230 480,230 1440,230 1520,230 1600,230 1680,230 1760,230 1400,310 1480,310 1560,310 1640,310 1720,310 1440,390 1520,390 1600,390 1680,390 1760,390 1400,470 1480,470 1560,470 1640,470 1720,470 1440,550 1520,550 1600,550 1680,550 1760,550 1400,630 1480,630 1560,630 1640,630 1720,630 1440,710 1520,710 1600,710 1680,710 1760,710 1400,790 1480,790 1560,790 1640,790 1720,790 1440,870 1520,870 1600,870 1680,870 1760,870 1400,950 1480,950 1560,950 1640,950 1720,950 1440,1030 1520,1030 1600,1030 1680,1030 1760,1030 1400,1110 1480,1110 1560,1110 1640,1110 1720,1110 1440,1190 1520,1190 1600,1190 1680,1190 1760,1190 1400,1270 1480,1270 1560,1270 1640,1270 1720,1270 1440,1350 1520,1350 1600,1350 1680,1350 1760,1350 1400,1430 1480,1430 1560,1430 1640,1430 1720,1430 1440,1510 1520,1510 1600,1510 1680,1510 1760,1510 1400,1590 1480,1590 1560,1590 1640,1590 1720,1590 1440,1670 1520,1670 1600,1670 1680,1670 1760,1670 1400,1750 1480,1750 1560,1750 1640,1750 1720,1750 1440,1830 1520,1830 1600,1830 1680,1830 1760,1830 1400,1910 1480,1910 1560,1910 1640,1910 1720,1910 1440,1990 1520,1990 1600,1990 1680,1990 1760,1990 1400,2070 1480,2070 1560,2070 1640,2070 1720,2070 1440,2150 1520,2150 1600,2150 1680,2150 1760,2150 120,3670 200,3670 320,3750 400,3750 480,3750 560,3750 640,3750 4800,3750 4880,3750 4960,3750 5040,3750 5120,3750 5200,3750 5280,3750 5360,3750 5440,3750 5520,3750 5600,3750 5680,3750 5760,3750 5840,3750 5920,3750 6000,3750
Sig1: P1.3 R2_M1.1 | length 1156.9
  Signal layer w40: R2_M1.1 2590,3475 2655,3540 P1.3
Sig2: P1.1 R2_M2.1 | length 126.6
  Signal layer w40: P1.1 3775,3580 R2_M2.1
Vin1: F1.2 R6.2 U2.1 U2.2 U2.3 U2.4 U2.5 U2.6 U2.7 U2.8 U2.9 U2.10
pads on no net: F1.MH1

## Polygon pours and split planes (outlines as drawn)
MS2 on Signal layer "Signal layer-MS2 1" (solid, pour order 137): 4725.03,2705 5685,2705 5685,3030 5955,3030 5955,3130 5875,3210 5875,3655 4725.03,3655
NetC1_1 on Signal layer "Signal layer-NetC1_1" (solid, pour order 135): 3990,1830 4665,1155 5460,1155 5460,1505 5125,1505 5125,2555 4430,2555 4430,2170 3990,2170
PE on Signal layer "NONET_L01_P-001" (solid, remove dead copper, pour order 139): 0,-1.21 6280,-1.21 6300,-1.21 6300,3938.79 0,3938.79
GND on Signal layer "NONET_L01_P-001" (solid, remove dead copper, pour order 118): 1397.39,3880 4630,3880 4630,2665 4590,2625 1392.81,2625
MS2 on Signal layer "NONET_L01_P-001" (solid, pour order 114): 2180,2615 2180,2240 4325,2240 4325,2550 3945,2550 3760,2735 3760,2990 2975,2990 2975,2615
MS2 on Signal layer "Signal layer-MS2" (solid, pour order 134): 1050,2265 1877.43,2265 1872.43,2985 50,2985 50,1785 520,1785 520,2680 1050,2680
NetD1_1 on Signal layer "Signal layer-NetD1_1" (solid, pour order 130): 1877.57,2170 1882.4,85 3925,85 3925,625 3350,1200 2780,1200 2780,2170
Vin1 on Signal layer "Signal layer-Vin1" (solid, pour order 127): 590,70 1285,70 1285,2170 975,2170 975,2605 590,2605 590,745 50,745 50,335 590,335
NetF1_1 on Signal layer "NONET_L01_P-001" (solid, pour order 124): 520,1690 40,1690 40,1015 520,1015
NetC2_1 on Signal layer "Signal layer-NetC2_1" (solid, pour order 122): 3405,1250 4040,615 6035,615 6035,1380 6035,1850 5980,1850 5700,1850 5700,1515 5530,1515 5530,1080 4645,1080 3925,1800 3925,2165 2845,2165 2845,1250
NetC2_2 on Signal layer "NONET_L01_P-001" (solid, pour order 121): 6280,2605 6100,2605 6100,550 5590,550 5590,75 6280,75
NetC13_1 on Signal layer "Signal layer-NetC13_1" (solid, pour order 120): 5670,1920 6025.11,1920 6025.11,2680 6280,2680 6280,3600 5935,3600 5935,2865 5670,2865
NetC3_1 on Signal layer "Signal layer-NetC3_1" (solid, pour order 117): 5200,1585 5635,1585 5635,1840 5590,1840 5590,2635 5045,2635 5045,2330 5200,2330 5200,2165
NetC1_2 on Signal layer "NONET_L01_P-001" (solid, pour order 116): 4005,550 4005,80 5520,80 5520,550
MS2 on Power layer 1 "Power layer 1-MS2" (solid, pour order 133): 230,1780 520,1780 520,2675 1050,2675 1050,2265 5035,2265 5035,2705 5975,2705 5975,3605 4720,3605 4720,3335 230,3335
NetC1_1 on Power layer 1 "Signal layer-NetC1_1" (solid, pour order 132): 3990,1830 4665,1155 5460,1155 5460,1505 5125,1505 5125,2170 4430,2170 3990,2170
NetD1_1 on Power layer 1 "NONET_L01_P-001" (solid, pour order 115): 1885,2165 2775,2165 2775,1185 3280,1185 3925,540 3925,80 1885,80
PE on Power layer 1 "NONET_L01_P-001" (solid, remove dead copper, pour order 136): 0,0 6280,0 6300,0 6300,3940 0,3940

## Keep-outs
Keep-Out Layer:
  lines w10: 0,0 6300,0 6300,3940 0,3940 0,0

## Other copper
Power layer 1:
  region net GND: 4645,3542.5 4645,3417.5 4525,3417.5 4525,3542.5
  pour cut-out: 755,2165 1015,2165 1015,105 755,105
  pour cut-out: 3740,2600 4800,2600 4800,3605 3740,3605
  pour cut-out: 145,3562.69 145,3050 1925,3050 1925,3557.43
  pour cut-out: 1920,2590 2980,2590 2980,3600 1920,3600
Signal layer:
  rectangle net GND: 1715,3210 1865,3360
  pour cut-out: 1395,2915 1885,2915 1885,3050 1395,3050
  pour cut-out: 1955,3050 1880,3050 1880,2625 1955,2625
  pour cut-out: 2975.32,3025 1945,3025 1945,2615 2972.02,2615
  pour cut-out: 4715,3255 3985,3255 3985,2890 4712.06,2890
  region net NetC1_2: 5285,235 5285,125 5520,125 5520,235

## Silkscreen, mask and mechanical layers (free items; w line width, h text height)
Top Overlay:
  drawing of 646 lines, arcs and shapes, not listed
  text "12 V" at 110,3630 h60
  text "Output" at 5695,3610 h60
  text "Input" at 85,2040 h60

## Text inside footprints (layer, text, board x,y; h text height)
C11: Top Overlay "+" at 870,3790 h60 r270
C12: Top Overlay "+" at 1875,3800 h60 r270
P1: Top Overlay "1" at 3815,3560 h50 r180; Top Overlay "2" at 3835,3460 h50 r180; Top Overlay "4" at 3575,3460 h50 r180; Top Overlay "3" at 3565,3555 h50 r180